# EAGLE board SEM (EAGLE 8.6.0)

Size 29.14 x 106.5 mm. Coordinates in mm from the lower left corner, seen from the top.
Copper layers (1*16): Top 0.035559375mm / dielectric 1.6mm / Bottom 0.035559375mm
Design rules "oshpark-2layer": minimum track width 6mil, minimum drill 10mil, track to track 6mil, track to pad 6mil, pad to pad 6mil, via to via 6mil, smd to smd 6mil, copper to edge 15mil, drill to drill 6mil, minimum pad ring 5mil, minimum via ring 5mil, stop-mask expansion 2.5mil, vias tented up to drill 0mil, thermal gap 10mil

## Footprints (pad centres in the part's own frame; a part is rotated, then mirrored left to right if it is on the bottom)
WQP-PJ301M-12_JACK = drill 1.1: P$1_TIP 0,5; P$2_SWITCH 0,-3.5; P$3_SLEEVE 0,-6.5
9MM_SNAP-IN_POT = drill 1.1 square: 1 -2.5,-7 | drill 1.1 octagon: 2 0,-7; 3 2.5,-7 | drill 2.1 pad 2.794: CHASSIS1 -4.5,0; CHASSIS2 4.5,0
TO92 = drill 0.813 octagon: 1 1.27,0; 2 0,1.905; 3 -1.27,0
EURO_POWER_HEADER = drill 1.016 octagon: 1 -5.08,-1.27; 2 -5.08,1.27; 3 -2.54,-1.27; 4 -2.54,1.27; 5 0,-1.27; 6 0,1.27; 7 2.54,-1.27; 8 2.54,1.27; 9 5.08,-1.27; 10 5.08,1.27
SO14 = smd 0.6 x 2.2: 1 -3.81,-2.6; 2 -2.54,-2.6; 3 -1.27,-2.6; 4 0,-2.6; 5 1.27,-2.6; 6 2.54,-2.6; 7 3.81,-2.6; 8 3.81,2.6; 9 2.54,2.6; 10 1.27,2.6; 11 0,2.6; 12 -1.27,2.6; 13 -2.54,2.6; 14 -3.81,2.6

## Placement (x,y rotation side)
E$1  [EURORACK6HPPCB]  -0.5,0 0 top
E$2  [WQP-PJ301M-12_JACK]  4.96,6.6 180 top
E$3  [WQP-PJ301M-12_JACK]  14.61,6.6 180 top
E$4  [WQP-PJ301M-12_JACK]  24.27,6.6 180 top
E$5  [WQP-PJ301M-12_JACK]  4.96,19.56 0 top
E$6  [WQP-PJ301M-12_JACK]  14.61,19.56 0 top
E$7  [WQP-PJ301M-12_JACK]  24.27,19.56 0 top
E$8  [WQP-PJ301M-12_JACK]  4.96,32 180 top
E$9  [WQP-PJ301M-12_JACK]  14.61,32.13 180 top
E$10  [WQP-PJ301M-12_JACK]  24.27,32.13 180 top
E$11  [9MM_SNAP-IN_POT]  14.74,96.52 0 top
E$12  [9MM_SNAP-IN_POT]  6.61,49.53 0 top
E$13  [9MM_SNAP-IN_POT]  22.61,49.53 0 top
E$14  [9MM_SNAP-IN_POT]  6.61,76.2 0 top
E$15  [9MM_SNAP-IN_POT]  22.61,68.58 0 top
E$16  [TO92]  4.58,102.87 0 top
E$17  [EURO_POWER_HEADER]  24.9,97.79 90 top
E$18  [TO92]  4.58,99.06 180 top
E$19  [TO92]  3.31,63.5 0 top
E$20  [TO92]  4.58,88.9 180 top
E$21  [TO92]  24.9,85.09 0 top
E$22  [TO92]  24.9,81.28 180 top
E$23  [TO92]  18.55,85.09 0 top
E$24  [TO92]  18.55,81.28 180 top
E$25  [TO92]  14.74,63.5 0 top
E$26  [TO92]  14.74,58.42 180 top
E$27  [TO92]  9.03,58.42 180 top
E$28  [TO92]  9.03,63.5 0 top
E$29  [SO14]  4.58,100.33 90 top
E$30  [SO14]  4.58,88.9 90 top

## Library data of the parts
E$1 E$29 E$30 = EurorackModularParts
E$2-E$28 = MusicThingModular